# EAGLE board 430 (EAGLE 8.7.0)
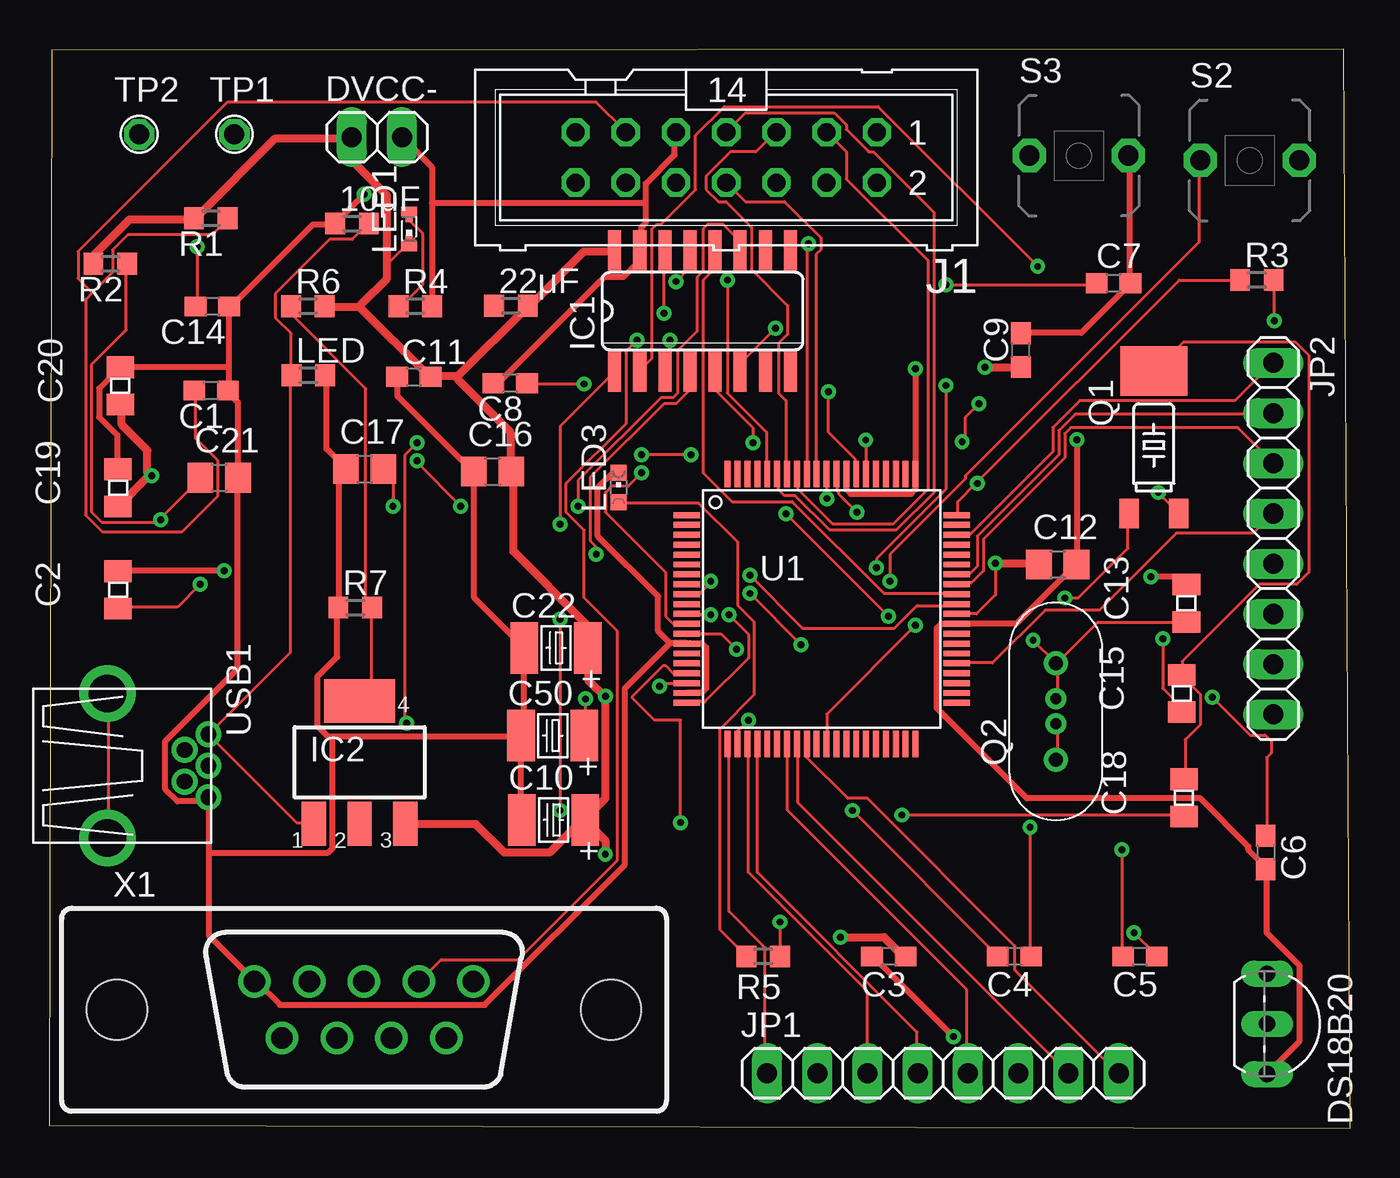
[diagram p0: board, top side]
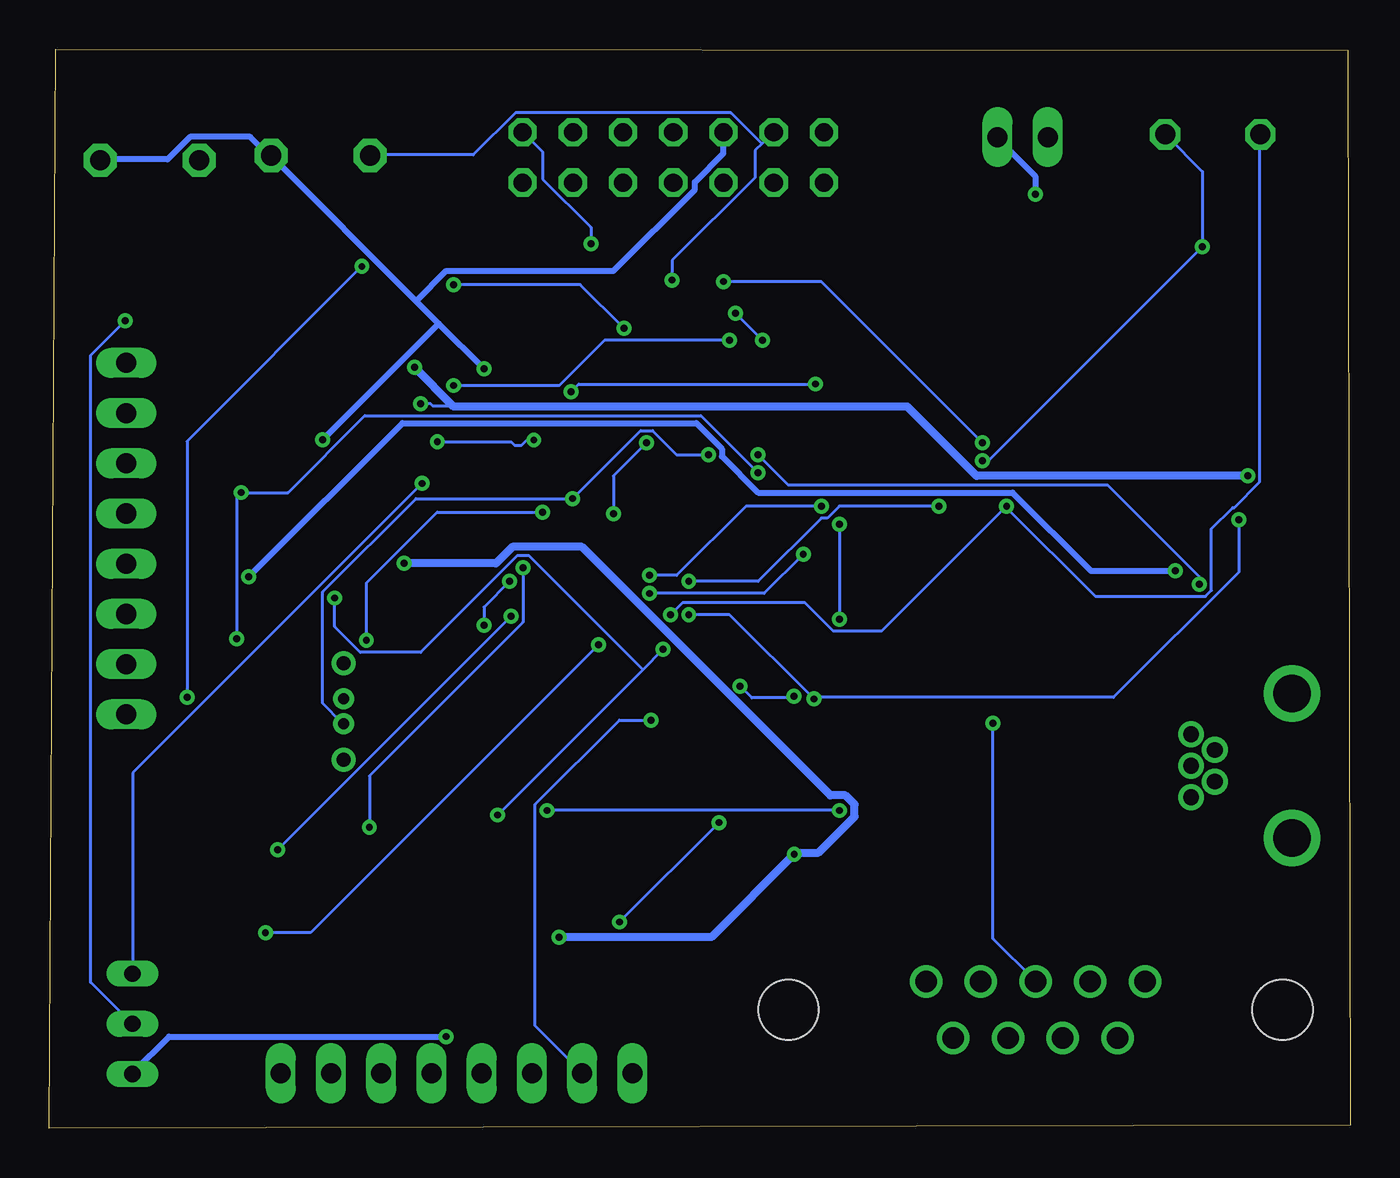
[diagram p1: board, bottom side, seen from below]

Size 65.79 x 54.54 mm. Coordinates in mm from the lower left corner, seen from the top.
Outline: 0,0.13 65.79,0 65.48,54.54 0.12,54.51 0,0.13
Copper layers (1*16): Top 0.035mm / dielectric 1.5mm / Bottom 0.035mm
Design rules "default": minimum track width 6mil, minimum drill 0.35mm, track to track 6mil, track to pad 6mil, pad to pad 6mil, via to via 6mil, smd to smd 6mil, copper to edge 40mil, drill to drill 6mil, minimum pad ring 10mil, minimum via ring 8mil, stop-mask expansion 4mil, vias tented up to drill 0mil, thermal gap 10mil
Net classes: 1 Ground: width 0.305 mm, drill 0.305 mm, clearance 0.152 mm to class 0, clearance 0.152 mm; 2 Power: width 0.406 mm, drill 0.305 mm, clearance 0.152 mm to class 0, clearance 0.152 mm to class 1, clearance 0.152 mm

## Footprints (pad centres in the part's own frame; a part is rotated, then mirrored left to right if it is on the bottom)
R0603 = smd 1 x 1.1: 1 -0.85,0; 2 0.85,0
C0603 = smd 1.1 x 1: 1 -0.85,0; 2 0.85,0
CSMD0805 = smd 1.092 x 1.397: 1 -0.94,0; 2 0.94,0
1210ELKO = smd 1.397 x 2.591: + 1.6,0; - -1.6,0
C0805 = smd 1.3 x 1.5: 1 -0.95,0; 2 0.95,0
TO92- = drill 0.813 long: 1 2.54,0; 2 0,0; 3 -2.54,0
1X02 = drill 1.016 long: 1 -1.27,0; 2 1.27,0
SO16 = smd 0.66 x 2.032: 1 -4.445,-3.073; 2 -3.175,-3.073; 3 -1.905,-3.073; 4 -0.635,-3.073; 5 0.635,-3.073; 6 1.905,-3.073; 7 3.175,-3.073; 8 4.445,-3.073; 9 4.445,3.073; 10 3.175,3.073; 11 1.905,3.073; 12 0.635,3.073; 13 -0.635,3.073; 14 -1.905,3.073; 15 -3.175,3.073; 16 -4.445,3.073
SOT223 = smd 1.219 x 2.235: 1 -2.311,-3.099; 2 0,-3.099; 3 2.311,-3.099 | smd 3.6 x 2.2: 4 0,3.099
ML14 = drill 0.914 octagon: 1 -7.62,-1.27; 2 -7.62,1.27; 3 -5.08,-1.27; 4 -5.08,1.27; 5 -2.54,-1.27; 6 -2.54,1.27; 7 0,-1.27; 8 0,1.27; 9 2.54,-1.27; 10 2.54,1.27; 11 5.08,-1.27; 12 5.08,1.27; 13 7.62,-1.27; 14 7.62,1.27
1X08 = drill 1.016 long: 1 -8.89,0; 2 -6.35,0; 3 -3.81,0; 4 -1.27,0; 5 1.27,0; 6 3.81,0; 7 6.35,0; 8 8.89,0
SMARTLED-TTW = smd 0.8 x 0.5: A 0,-0.875; C 0,0.875 | smd 0.35 x 0.35: A@1 0,-0.5; C@1 0,0.5
CHIPLED_0603 = smd 0.8 x 0.8: A 0,-0.75; C 0,0.75
F20XX_PIR_DEMO_&_EVAL_CMJ206T = smd 1 x 1.5: P1 -1.25,-5; P2 1.25,-5 | smd 3.4 x 2.5: P3 0,2.2
QUARZ_HC49_4P = drill 0.7: 1 2.44,0; 2 -2.44,0 | drill 0.55: 1.1 0.635,0; 2.1 -0.635,0
PBTH = drill 1.016 pad 1.676 octagon: 1 -0.001,0.001; 2 5.001,0.001
TP = drill 1.016 octagon: 1 0,0
PN80 = smd 1.35 x 0.3: 1 -6.825,4.75; 2 -6.825,4.25; 3 -6.825,3.75; 4 -6.825,3.25; 5 -6.825,2.75; 6 -6.825,2.25; 7 -6.825,1.75; 8 -6.825,1.25; 9 -6.825,0.75; 10 -6.825,0.25; 11 -6.825,-0.25; 12 -6.825,-0.75; 13 -6.825,-1.25; 14 -6.825,-1.75; 15 -6.825,-2.25; 16 -6.825,-2.75; 17 -6.825,-3.25; 18 -6.825,-3.75; 19 -6.825,-4.25; 20 -6.825,-4.75; 41 6.825,-4.75; 42 6.825,-4.25; 43 6.825,-3.75; 44 6.825,-3.25; 45 6.825,-2.75; 46 6.825,-2.25; 47 6.825,-1.75; 48 6.825,-1.25; 49 6.825,-0.75; 50 6.825,-0.25; 51 6.825,0.25; 52 6.825,0.75; 53 6.825,1.25; 54 6.825,1.75; 55 6.825,2.25; 56 6.825,2.75; 57 6.825,3.25; 58 6.825,3.75; 59 6.825,4.25; 60 6.825,4.75 | smd 0.3 x 1.35: 21 -4.75,-6.825; 22 -4.25,-6.825; 23 -3.75,-6.825; 24 -3.25,-6.825; 25 -2.75,-6.825; 26 -2.25,-6.825; 27 -1.75,-6.825; 28 -1.25,-6.825; 29 -0.75,-6.825; 30 -0.25,-6.825; 31 0.25,-6.825; 32 0.75,-6.825; 33 1.25,-6.825; 34 1.75,-6.825; 35 2.25,-6.825; 36 2.75,-6.825; 37 3.25,-6.825; 38 3.75,-6.825; 39 4.25,-6.825; 40 4.75,-6.825; 61 4.75,6.825; 62 4.25,6.825; 63 3.75,6.825; 64 3.25,6.825; 65 2.75,6.825; 66 2.25,6.825; 67 1.75,6.825; 68 1.25,6.825; 69 0.75,6.825; 70 0.25,6.825; 71 -0.25,6.825; 72 -0.75,6.825; 73 -1.25,6.825; 74 -1.75,6.825; 75 -2.25,6.825; 76 -2.75,6.825; 77 -3.25,6.825; 78 -3.75,6.825; 79 -4.25,6.825; 80 -4.75,6.825
USB-MB-H = drill 0.8: D+ 5.1,0; D- 3.9,0.8; GND 5.1,-1.6; ID 3.9,-0.8; VBUS 5.1,1.6 | drill 1.9: GND@1 0,3.65; GND@2 0,-3.65
H2R09ST = drill 1.092: 1 5.537,1.422; 2 2.769,1.422; 3 0,1.422; 4 -2.769,1.422; 5 -5.537,1.422; 6 4.153,-1.422; 7 1.384,-1.422; 8 -1.384,-1.422; 9 -4.153,-1.422 | hole 3.048: -12.497,0; 12.497,0

## Placement (x,y rotation side)
10μF  [R0603]  15.3,45.74 0 top
22μF  [R0603]  23.35,41.58 0 top
C1  DNP  [C0603]  8.18,37.29 180 top
C2  47pF  [CSMD0805]  3.47,27.22 90 top
C3  0.1uF  [C0603]  42.46,8.68 180 top
C4  0.1uF  [C0603]  48.81,8.68 180 top
C5  0.1uF  [C0603]  55.16,8.68 180 top
C6  0.1uF  [C0603]  61.52,13.93 270 top
C7  0.1uF  [C0603]  53.83,42.72 0 top
C8  220n  [C0603]  23.31,37.66 180 top
C9  220n  [C0603]  49.14,39.34 90 top
C10  10uF/6,3V  [1210ELKO]  25.5,15.58 0 top
C11  100n  [C0603]  18.43,37.99 0 top
C12  100n  [C0805]  51,28.5 0 top
C13  47pF  [CSMD0805]  57.51,26.54 90 top
C14  DNP  [C0603]  8.25,41.55 180 top
C15  12pF  [CSMD0805]  57.27,21.98 90 top
C16  100n  [C0805]  22.42,33.2 0 top
C17  470n  [C0805]  15.94,33.32 0 top
C18  12pF  [CSMD0805]  57.39,16.7 90 top
C19  10µF  [CSMD0805]  3.47,32.37 90 top
C20  100nF  [CSMD0805]  3.59,37.53 90 top
C21  100n  [C0805]  8.6,32.89 0 top
C22  10uF/6,3V  [1210ELKO]  25.63,24.28 0 top
C50  10uF/6,3V  [1210ELKO]  25.46,19.85 0 top
DS18B20  2N5484  [TO92-]  61.59,5.27 270 top
DVCC-  [1X02]  16.57,50.11 0 top
IC1  MAX3232CSE  [SO16]  33.04,41.31 0 top
IC2  LM340MP-05  [SOT223]  15.69,18.49 0 top
J1  [ML14]  34.23,49.08 180 top
JP1  [1X08]  45.19,2.77 0 top
JP2  [1X08]  61.91,29.81 270 top
LED  [R0603]  13.1,38.07 0 top
LED1  [SMARTLED-TTW]  18.2,45.47 0 top
LED3  [CHIPLED_0603]  28.79,32.4 0 top
Q1  32.768kHz  [F20XX_PIR_DEMO_&_EVAL_CMJ206T]  55.86,36.08 0 top
Q2  QUARZ_HC49_4P-1  [QUARZ_HC49_4P]  50.91,21.07 90 top
R1  47k  [R0603]  8.16,46 180 top
R2  0R  [R0603]  3.08,43.7 180 top
R3  [R0603]  61.07,42.89 0 top
R4  [R0603]  18.51,41.56 0 top
R5  470R  [R0603]  36.11,8.68 180 top
R6  [R0603]  13.08,41.56 0 top
R7  [R0603]  15.47,26.32 0 top
S2  [PBTH]  58.22,48.94 0 top
S3  F5529_RST  [PBTH]  49.58,49.18 0 top
TP1  [TP]  9.36,50.24 0 top
TP2  [TP]  4.53,50.24 0 top
U1  MSP430F5529IPNR  [PN80]  39.06,26.25 0 top
USB1  F5529 Mini-USB  [USB-MB-H]  2.94,18.32 0 top
X1  D-SUB9-H2R09ST  [H2R09ST]  15.91,5.99 0 top

## Library data of the parts
10μF 22μF C3-C7 LED R3 R4 R6 R7 = resistor
C1 C8 C9 C11 C12 C14 C16 C17 C21 R1 R2 = rcl
C2 C13 C15 C18-C20 = CAP
C10 C22 C50 = smd
DS18B20 = transistor-fet
DVCC- JP1 JP2 = pinhead
IC1 = maxim; MPN: MAX3232CSE; OC_FARNELL: 9725490; OC_NEWARK: 90C2890
IC2 = linear
J1 = CON-ML
LED1 LED3 = led
Q1 = MSP-EXP430F5438
Q2 = Project7264
R5 = _MSP430
S2 S3 = electricalmeter
TP1 TP2 = _5438_ATC
U1 = TI_MSP430_v16_intern
USB1 = _con-usb-2
X1 = con-thomas-betts; OC_FARNELL: unknown; OC_NEWARK: unknown

## Nets
5529_LDO [Power]: C9.1 C19.1 C20.1 U1.66
5529_VBUS [Power]: U1.65
A5: U1.2
ACCEL_CS: U1.42
ACCEL_INT: U1.34
ACCEL_PWR: U1.43
ACCEL_SCK: U1.36
ACCEL_SIMO: U1.40
ACCEL_SOMI: U1.41
AVCC: C21.1 C50.+ R2.1 U1.11
CB0: U1.77
CB1: U1.78
CB2: U1.79
CB3: U1.80
CB4: U1.1
CBOUT: JP1.5 U1.27
DVCC [Power]: 22μF.2 C3.1 C10.+ C11.2 C12.1 C16.2 C22.+ DVCC-.1 IC1.16 IC2.3 LED1.A@1 R1.2 R2.2 R6.2 U1.18 U1.50
GND [Ground]: 10μF.1 C1.1 C3.2 C6.2 C7.2 C8.2 C9.2 C10.- C11.1 C12.2 C14.1 C16.1 C17.1 C19.2 C20.2 C21.2 C22.- C50.- DS18B20.1 DVCC-.2 IC1.15 J1.9 LED3.C LED.2 R4.2 R7.1 S2.2 S3.2 U1.14 U1.19 U1.49 U1.61 U1.68 USB1.GND X1.5
JTAG_PWR [Power]: J1.2
JTAG_SENSE: J1.4
LCD_BL_EN: U1.59
LCD_CS: U1.57
LCD_D/C: U1.55
LCD_RST: U1.56
LFXTGND: C15.2 C18.2 Q1.P3
N$1: DS18B20.2 R3.2
N$2: C4.2 IC1.1
N$3: LED1.C@1 R4.1
N$4: C4.1 IC1.3
N$5: C5.2 IC1.5
N$6: C5.1 IC1.4
N$7: C6.1 IC1.2
N$8: C7.1 IC1.6
N$9: IC1.13 X1.3
N$10: IC1.14 X1.2
N$12: IC2.4 R6.1 R7.2
N$14: 10μF.2 IC2.1 LED.1 USB1.VBUS
N$18: JP1.6
N$21: LED3.A R5.2
N$26: JP2.5
N$27: JP2.6
N$28: JP2.7
N$29: JP2.8
N$39: USB1.GND@1 USB1.GND@2
P1.0: JP1.1 U1.21
P1.1: JP1.2 U1.22
P1.2: JP1.3 U1.23
P1.3: JP1.4 U1.24
P1.4: U1.25
P1.5: U1.26
P1.7: JP1.7 U1.28
P2.0: JP1.8 U1.29
P2.1: U1.30
P2.2: S2.1 U1.31
P2.3: U1.32
P2.4: U1.33
P4.0: JP2.4 U1.45
P4.6: JP2.3 U1.53
P4.7: JP2.2 U1.54
P5.1: U1.10
P6.6: U1.3
P6.7: U1.4
P7.0: U1.5
P7.1: U1.6
P7.2: U1.7
P7.3: U1.8
P7.5: JP2.1 U1.58
P7.7: DS18B20.3 R3.1 U1.60
P8.0: U1.15
P8.1: U1.16
P8.2: R5.1 U1.17
PU.0/DP: U1.62
PU.1/DM: U1.64
PUR: U1.63
RF_SIMO: U1.37
RF_SOMI: U1.38
RF_SPI_CLK: U1.39
RF_STE: U1.35
RST/NMI: C1.2 J1.11 R1.1 S3.1 U1.76
RXD: IC1.12 U1.52
SCLK: U1.48
SD_CS: U1.44
SIMO: U1.46
SOMI: U1.47
TCK: J1.7 U1.75
TDI: J1.3 U1.73
TDO: J1.1 U1.72
TEST: J1.8 U1.71
TMS: J1.5 U1.74
TXD: IC1.11 U1.51
V18: C8.1 U1.67
VCORE: C17.2 TP2.1 U1.20
VREF+: C14.2 TP1.1 U1.9
XIN: C15.1 Q1.P2 U1.12
XOUT: C18.1 Q1.P1 U1.13
XT2GND [Ground]: C2.2 C13.2
XT2IN: C13.1 Q2.1 Q2.1.1 U1.69
XT2OUT: C2.1 Q2.2 Q2.2.1 U1.70

## Tracks (layer width: path | path; a pad name or v marks a point on that pad's centre or on a via)
5529_LDO  (via drill 0.35)
  Top 0.152: v47.02,36.63 46.32,35.93 46.32,34.74 46.21,34.74 v46.17,34.7 | v41.29,34.79 41.29,33.09 U1.66
  Top 0.406: v47.32,38.46 49.07,38.46 C9.1 | C19.1 3.5,31.45 5.03,32.98 v5.18,32.98 4.95,33.13 4.95,34.27 3.66,35.57 3.66,36.56 C20.1
  Bottom 0.152: 45.34,36.48 45.36,36.5 46.39,36.5 46.52,36.63 v47.02,36.63 | v46.17,34.7 42.44,34.7 42.27,34.53 41.9,34.53 41.65,34.78 41.31,34.78 v41.29,34.79
  Bottom 0.406: v47.32,38.46 45.34,36.48 22.4,36.48 18.9,32.98 v5.18,32.98
AVCC  (via drill 0.35)
  Top 0.152: v33.45,25.97 32.31,25.97 U1.11 | v27.13,21.7 27.13,19.87 C50.+ | 5.6,30.81 7.62,32.82 C21.1 | 5.6,30.81 5.41,30.61 2.67,30.61 2.13,31.15 2.13,38.62 3.89,40.37 3.89,43.64 R2.1 | v5.64,30.77 5.6,30.81
  Bottom 0.152: v33.45,25.97 31.39,25.97 v27.13,21.7 27.13,21.78 11.96,21.78 5.64,28.1 v5.64,30.77
CBOUT
  Top 0.152: U1.27 37.34,19.41 37.34,16.06 46.41,6.99 46.41,2.8 JP1.5
DVCC  (via drill 0.35)
  Top 0.152: v47.85,28.56 47.85,26.96 46.89,26 U1.50 | 28.12,21.78 v28.12,21.83 | v30.86,22.35 31.01,22.5 U1.18 | LED1.A@1 18.2,44.8 17.07,43.67
  Top 0.406: R2.2 2.29,43.72 2.29,44.18 4.04,45.93 7.24,45.93 R1.2 7.47,46.08 11.43,50.05 15.24,50.05 DVCC-.1 15.32,49.89 15.32,48.9 17.07,47.15 17.07,43.67 17.07,42.96 15.77,41.66 15.7,41.51 | 20.65,38.01 19.36,38.01 C11.2 19.13,38.08 15.7,41.51 | 20.65,38.01 24.16,41.51 22μF.2 24.38,41.66 27.05,44.33 28.57,44.33 IC1.16 | 15.7,41.51 13.95,41.51 R6.2 | 20.65,38.01 20.65,37.85 23.32,35.19 23.32,33.21 C16.2 23.47,33.05 23.47,29.17 27.13,25.51 27.13,24.44 C22.+ 27.28,24.21 27.28,22.61 28.12,21.78 28.12,16.67 27.2,15.76 C10.+ | v40.01,9.66 42.22,9.66 43.13,8.75 43.28,8.75 C3.1 | v28.12,13.85 28.12,14.54 27.13,15.53 C10.+ | v47.85,28.56 49.99,28.56 C12.1 | IC2.3 18.06,15.37 21.57,15.37 23.01,13.93 25.3,13.93 26.9,15.53 C10.+
  Bottom 0.152: v28.12,21.83 28.2,21.75 30.26,21.75 v30.86,22.35
  Bottom 0.406: v40.01,9.66 32.31,9.66 v28.12,13.85 27.96,13.93 26.9,13.93 25.07,15.76 25.07,16.37 25.53,16.82 26.29,16.82 38.86,29.4 42.37,29.4 43.2,28.56 v47.85,28.56
GND  (via drill 0.35)
  Top 0.305: LED.2 14.02,38.01 14.02,34.35 14.94,33.43 C17.1 14.94,33.28 14.63,32.98 14.63,26.35 R7.1 14.55,26.19 14.55,23.83 13.56,22.84 13.56,20.33 14.1,19.79 14.33,19.79 | C11.1 17.6,37.93 17.6,37.02 21.41,33.21 C16.1 21.49,33.05 21.49,26.8 23.93,24.37 C22.- 24,24.21 24,19.87 C50.- | C50.- 23.85,19.79 23.85,15.6 C10.- | 14.33,19.79 23.7,19.79 C50.- | C19.2 3.43,33.36 3.43,35.03 2.52,35.95 2.52,37.4 C20.2 3.73,38.46 9.07,38.46 | 9.07,38.46 9.07,41.51 C14.1 9.22,41.59 13.34,45.7 14.4,45.7 10μF.1 14.55,45.85 v15.93,47.23 | 9.07,38.46 9.07,37.32 C1.1 9.07,37.17 9.53,36.71 9.53,32.9 C21.2 9.53,32.75 9.53,23.22 5.87,19.57 5.87,17.13 6.48,16.52 8,16.52 USB1.GND 8.08,16.67 8.08,13.93 | 31.39,24.52 30.79,25.13 30.79,26.88 27.74,29.93 27.74,32.37 28.5,33.13 28.73,33.13 LED3.C | 31.39,24.52 32.23,24.52 U1.14 32.38,24.52 32.99,24.52 33.22,24.29 33.22,22.23 32.99,22 32.31,22 U1.19 | 8.08,13.93 8.08,9.74 10.36,7.45 X1.5 10.52,7.37 11.66,6.23 22.02,6.23 29.11,13.32 29.11,22.23 31.39,24.52 | 14.33,19.79 14.33,14.16 14.1,13.93 8.08,13.93 | v45.72,4.63 41.68,8.67 C3.2 | DS18B20.1 61.65,2.8 63.25,4.4 63.25,8.21 61.57,9.89 61.57,13.01 C6.2 61.49,13.24 60.66,14.08 60.66,14.23 58.22,16.67 49.45,16.67 44.88,21.24 44.88,25.28 45.11,25.51 45.8,25.51 U1.49 45.95,25.51 48.92,25.51 51.89,28.48 C12.2 51.97,28.63 v51.97,34.81 | 19.36,46.77 19.36,48.6 17.91,50.05 DVCC-.2 | 19.36,46.77 19.36,41.59 R4.2 | C8.2 22.48,37.7 22.71,37.7 28.04,43.04 29.03,43.04 29.79,43.8 29.79,44.33 IC1.15 29.95,44.48 29.95,45.55 30.18,45.78 30.18,46.77 | 30.18,46.77 30.18,47.76 31.62,49.21 31.62,50.35 J1.9
  Top 0.305: 30.18,46.77 19.36,46.77 | C9.2 49.15,40.22 52.2,40.22 54.63,42.65 C7.2 54.63,42.81 54.63,49.13 S3.2 | U1.68 40.31,33.05 40.31,32.29 40.54,32.06 43.59,32.06 43.81,32.29 43.81,33.05 U1.61 43.81,33.21 v43.81,38.39
  Bottom 0.305: v45.72,4.63 59.74,4.63 61.57,2.8 DS18B20.1 | 47.24,41.82 54.56,49.13 S3.2 54.71,49.21 55.63,50.12 58.67,50.12 59.82,48.98 63.17,48.98 S2.2 | 47.24,41.82 46.1,40.67 | 46.1,40.67 v43.81,38.39 | 47.24,41.82 45.72,43.34 37.26,43.34 33.15,47.45 33.15,47.84 31.7,49.28 J1.9 | 46.1,40.67 v51.97,34.81 | v15.93,47.23 15.93,48.14 17.83,50.05 DVCC-.2
LFXTGND
  Top 0.152: C18.2 57.45,17.66 57.45,19.64 58.22,20.4 58.22,21.93 57.3,22.84 C15.2 57.3,22.92 57.3,23.6 61.19,27.49 63.09,27.49 63.7,28.1 63.7,39.07 63.02,39.76 57.38,39.76 55.93,38.31 Q1.P3
N$1  (via drill 0.35)
  Top 0.152: v61.95,40.83 61.95,42.88 R3.2
  Bottom 0.152: v61.95,40.83 63.7,39.07 63.7,7.37 61.65,5.32 DS18B20.2
N$2  (via drill 0.35)
  Top 0.152: v40.62,16.06 47.93,8.75 C4.2 | v25.83,25.74 v25.83,16.06 | v25.83,30.54 25.83,35.49 28.57,38.23 IC1.1
  Bottom 0.152: v25.83,16.06 v40.62,16.06 | v25.83,30.54 v25.83,25.74
N$3
  Top 0.152: LED1.C@1 18.26,45.85 18.89,45.22 18.89,42.68 17.78,41.57 R4.1
N$4  (via drill 0.35)
  Top 0.152: v49.61,15.22 49.61,8.75 C4.1 | v41.83,28.33 41.83,28.79 45.34,32.29 v45.34,37.55 | v31.39,39.83 31.39,38.54 31.17,38.31 IC1.3
  Bottom 0.152: v49.61,15.22 49.61,17.81 41.83,25.59 v41.83,28.33 | v45.34,37.55 40.01,37.55 37.72,39.83 v31.39,39.83
N$5  (via drill 0.35)
  Top 0.152: v54.25,14.08 54.25,8.75 C5.2 | v37.26,31.07 v42.44,25.89 | v35.59,34.65 35.59,35.42 33.68,37.32 IC1.5
  Bottom 0.152: v42.44,25.89 v54.25,14.08 | v37.26,31.07 37.26,32.98 v35.59,34.65
N$6  (via drill 0.35)
  Top 0.152: v54.86,9.89 56.01,8.75 C5.1 | v35.43,27.03 v38.02,24.44 | v27.66,29.01 27.66,29.4 27.36,29.7 27.36,32.9 31.09,36.63 31.7,36.63 32.38,37.32 32.38,38.23 IC1.4
  Bottom 0.152: v54.86,9.89 52.58,9.89 v38.02,24.44 | v35.43,27.03 29.64,27.03 v27.66,29.01
N$7  (via drill 0.35)
  Top 0.152: v58.83,21.78 60.73,19.87 61.49,19.87 61.8,19.57 61.8,18.96 61.57,18.73 61.57,14.84 C6.1 | v49.99,43.57 41.91,51.65 34.14,51.65 32.69,50.2 32.69,47.45 30.94,45.7 30.71,45.7 30.48,45.47 30.48,38.92 29.87,38.31 IC1.2
  Bottom 0.152: v58.83,21.78 58.83,34.73 v49.99,43.57
N$8  (via drill 0.35)
  Top 0.152: v45.34,42.65 52.96,42.65 C7.1 | v36.73,40.44 34.98,38.69 34.98,38.31 IC1.6
  Bottom 0.152: v45.34,42.65 38.94,42.65 v36.73,40.44
N$9  (via drill 0.35)
  Top 0.152: v31.7,42.81 32.38,43.49 32.38,44.33 IC1.13 | v18.59,34.65 17.98,34.04 17.98,20.56 v18.06,20.48
  Bottom 0.152: v31.7,42.81 26.75,42.81 v18.59,34.65 | v18.06,20.48 18.06,9.58 15.93,7.45 X1.3
N$10  (via drill 0.35)
  Top 0.152: v31.09,41.21 31.09,44.33 IC1.14 | v29.72,39.83 29.18,39.3 29.18,35.64 26.14,32.6 26.14,31.15 27.05,30.23 27.05,26.8 28.73,25.13 28.73,13.55 23.7,8.52 19.81,8.52 18.75,7.45 X1.2
  Bottom 0.152: v29.72,39.83 v31.09,41.21
N$12
  Top 0.152: IC2.4 15.7,21.62 16.31,22.23 16.31,26.27 R7.2 16.31,26.35 16,26.65 16,37.4 12.27,41.13 12.27,41.51 R6.1
N$14
  Top 0.152: 10μF.2 16.08,45.7 15.32,44.94 14.17,44.94 11.43,42.2 11.43,40.98 12.19,40.22 12.19,38.08 LED.1 12.19,38.01 12.19,24.06 8.08,19.95 USB1.VBUS 8.08,19.87 12.5,15.45 13.34,15.45 IC2.1
N$21
  Top 0.152: LED3.A 28.8,31.61 32.84,31.61 34.82,29.62 34.82,26.42 35.66,25.59 35.66,21.93 33.91,20.18 33.91,10.04 35.2,8.75 R5.2
N$39
  Top 0.152: USB1.GND@2 2.97,14.69 2.97,21.93 USB1.GND@1
P1.0
  Top 0.152: U1.21 34.37,19.41 34.37,10.95 36.2,9.13 36.2,2.88 36.27,2.8 JP1.1
P1.1  (via drill 0.35)
  Top 0.152: v35.36,20.63 34.82,20.1 34.82,19.49 U1.22
  Bottom 0.152: v35.36,20.63 36.96,20.63 41.22,16.37 41.22,5.16 38.86,2.8 JP1.2
P1.2
  Top 0.152: U1.23 35.36,19.41 35.36,12.94 41.38,6.92 41.38,2.8 JP1.3
P1.3
  Top 0.152: U1.24 35.81,12.94 43.89,4.86 43.89,2.8 JP1.4
P1.7
  Top 0.152: U1.28 37.87,19.41 37.87,16.44 51.51,2.8 JP1.7
P2.0
  Top 0.152: U1.29 38.33,19.41 38.33,18.73 40.39,16.67 41.38,16.67 48.84,9.2 48.84,7.98 54.03,2.8 JP1.8
P2.2  (via drill 0.35)
  Top 0.152: v43.81,25.43 39.32,20.94 39.32,19.49 U1.31 | v42.52,27.64 42.52,29.01 46.33,32.82 46.33,32.98 58.14,44.79 58.14,48.9 S2.1
  Bottom 0.152: v43.81,25.43 43.81,26.35 v42.52,27.64
P4.0
  Top 0.152: U1.45 45.95,23.53 47.7,23.53 50.37,26.19 53.11,26.19 57,30.08 60.88,30.08 61.87,31.07 JP2.4
P4.6
  Top 0.152: U1.53 45.95,27.57 46.63,27.57 47.24,28.18 47.24,29.78 51.36,33.89 51.36,35.11 51.66,35.42 60.12,35.42 61.87,33.66 JP2.3
P4.7
  Top 0.152: U1.54 45.95,28.02 46.56,28.02 46.94,28.4 46.94,29.93 51.05,34.04 51.05,35.26 51.89,36.1 61.87,36.1 JP2.2
P7.5
  Top 0.152: U1.58 45.95,30 46.56,30 50.75,34.2 50.75,35.42 52.12,36.79 59.97,36.79 61.87,38.69 JP2.1
P7.7  (via drill 0.35)
  Top 0.152: 46.9,32.63 45.95,31.68 45.95,31.07 U1.60 | 46.9,32.63 57.15,42.88 60.2,42.88 R3.1 | v46.94,32.6 46.9,32.63
  Bottom 0.152: v46.94,32.6 61.57,17.97 61.57,7.83 DS18B20.3
P8.2  (via drill 0.35)
  Top 0.152: v36.96,10.42 36.96,8.75 R5.1 | v31.93,15.45 31.93,20.63 30.6,20.63 29.49,21.75 29.49,21.83 31.05,23.4 31.15,23.4 31.55,23 U1.17
  Bottom 0.152: v31.93,15.45 v36.96,10.42
RST/NMI  (via drill 0.35)
  Top 0.152: 2.17,42.23 3.2,43.26 3.2,44.41 3.96,45.17 8.23,45.17 8.99,45.93 R1.1 | 2.17,42.23 1.83,41.89 1.83,31 2.67,30.16 6.71,30.16 8.53,31.99 8.53,33.74 7.39,34.88 7.39,37.24 C1.2 | v34.29,42.88 34.29,37.17 36.27,35.19 36.27,33.13 U1.76 | 2.17,42.23 1.45,42.96 1.45,44.33 8.99,51.87 27.66,51.87 29.11,50.43 J1.11
  Bottom 0.152: v34.29,42.88 34.29,43.87 30.1,48.06 30.1,49.44 29.76,49.78 | 29.76,49.78 29.18,50.35 J1.11 | 29.76,49.78 31.32,51.34 42.22,51.34 44.35,49.21 49.53,49.21 S3.1
RXD
  Top 0.152: U1.52 45.87,27.03 42.22,27.03 37.57,31.68 34.52,31.68 33.07,33.13 33.07,42.88 33.6,43.42 33.6,44.33 IC1.12
TCK
  Top 0.152: U1.75 36.88,33.05 36.88,32.29 37.19,31.99 37.72,31.99 39.47,30.23 42.82,30.23 44.73,32.14 44.73,46.31 41.68,49.36 41.45,49.36 40.31,50.5 40.31,50.73 39.7,51.34 35.2,51.34 34.29,50.43 J1.7
TDI
  Top 0.152: U1.73 37.87,33.05 37.87,32.29 39.62,30.54 42.67,30.54 44.42,32.29 44.42,43.87 40.31,47.99 40.31,49.36 J1.3
TDO  (via drill 0.35)
  Top 0.152: v38.41,44.71 38.33,44.64 38.33,33.13 U1.72
  Bottom 0.152: v38.41,44.71 38.41,45.55 40.84,47.99 40.84,49.36 41.83,50.35 J1.1
TEST
  Top 0.152: U1.71 38.79,33.13 38.79,44.18 39.01,44.41 39.01,45.02 37.19,46.85 35.2,46.85 34.29,47.76 J1.8
TMS
  Top 0.152: U1.74 37.26,33.13 37.26,36.79 36.88,37.17 36.88,39.68 37.34,40.14 37.34,41.59 35.51,43.42 35.51,45.55 34.21,46.85 33.83,46.85 33.22,47.45 33.22,48.14 34.44,49.36 35.74,49.36 36.73,50.35 J1.5
TXD  (via drill 0.35)
  Top 0.152: v35.43,27.95 38.1,25.28 42.75,25.28 43.89,26.42 45.87,26.42 U1.51 | v26.75,31.45 26.75,32.75 30.94,36.94 31.55,36.94 31.77,37.17 31.77,39.3 32.77,40.29 32.77,43.04 33.07,43.34 33.07,45.47 33.3,45.7 34.06,45.7 34.9,44.86 34.9,44.41 IC1.11
  Bottom 0.152: v35.43,27.95 34.06,27.95 30.56,31.45 v26.75,31.45
V18  (via drill 0.35)
  Top 0.152: v27.05,37.62 24.23,37.62 C8.1 | v39.4,37.24 39.4,35.19 40.77,33.81 40.77,33.13 U1.67
  Bottom 0.152: v27.05,37.62 39.01,37.62 v39.4,37.24
VCORE  (via drill 0.35)
  Top 0.152: v34.37,25.97 35.36,24.98 35.36,23.76 33.15,21.55 32.31,21.55 U1.20 | v17.37,31.45 17.37,32.82 16.92,33.28 C17.2
  Bottom 0.152: v34.37,25.97 33.76,26.58 27.58,26.58 26.14,25.13 23.7,25.13 v17.37,31.45 17.37,31.38 12.88,26.88 7.32,26.88 7.01,27.19 7.01,30.31 5.94,31.38 5.87,31.38 4.57,32.67 4.57,50.2 TP2.1
VREF+  (via drill 0.35)
  Top 0.152: v7.47,44.56 7.47,41.59 C14.2 | v33.45,27.64 33.45,27.57 32.92,27.03 32.31,27.03 U1.9 | v20.8,31.45 18.59,33.66 v18.59,33.74
  Bottom 0.152: TP1.1 9.3,50.2 7.47,48.37 v7.47,44.56 18.29,33.74 v18.59,33.74 | v33.45,27.64 29.95,27.64 26.75,30.84 26.44,30.84 25.83,31.45 v20.8,31.45
XIN  (via drill 0.35)
  Top 0.152: v29.95,33.13 29.26,32.44 28.42,32.44 28.12,32.14 28.12,31.15 31.17,28.1 31.17,25.89 31.55,25.51 32.23,25.51 U1.12 | v56.08,32.14 57.07,31.15 Q1.P2 | v56.31,24.75 56.31,22.23 57.23,21.32 57.23,21.09 C15.1
  Bottom 0.152: v29.95,33.13 32.84,36.02 49.84,36.02 53.72,32.14 v56.08,32.14 56.31,31.91 v56.31,24.75
XOUT  (via drill 0.35)
  Top 0.152: v34.75,24.21 33.98,24.98 32.31,24.98 U1.13 | v43.13,15.83 57.38,15.83 C18.1 | v51.36,26.8 52.05,26.8 54.56,29.32 54.56,31.07 Q1.P1
  Bottom 0.152: v43.13,15.83 35.78,23.18 | 35.78,23.18 v34.75,24.21 | v51.36,26.8 51.36,25.36 50.06,24.06 47.02,24.06 42.14,28.94 41.53,28.94 35.78,23.18
XT2GND  (via drill 0.35)
  Top 0.305: v8.84,28.18 3.5,28.18 C2.2 | v55.7,27.87 57.07,27.87 57.45,27.49 C13.2
  Bottom 0.305: v8.84,28.18 13.11,28.18 17.07,32.14 29.95,32.14 31.77,33.97 31.77,34.35 33.07,35.64 47.93,35.64 v55.7,27.87
XT2IN  (via drill 0.35)
  Top 0.152: v40.84,31.15 39.93,32.06 39.93,32.14 39.85,32.21 39.85,33.05 U1.69 | v49.76,24.67 50.9,23.53 Q2.1 | C13.1 57.45,25.59 53.03,25.59 50.98,23.53 Q2.1 | Q2.1.1 50.98,21.78 50.98,23.45 Q2.1
  Bottom 0.152: v40.84,31.15 46.18,31.15 49.76,27.57 v49.76,24.67
XT2OUT  (via drill 0.35)
  Top 0.152: v39.32,31.83 39.32,33.05 U1.70 | v7.62,27.49 6.48,26.35 3.5,26.35 C2.1 | v32.46,34.04 v29.95,34.04 | Q2.2 50.98,18.65 50.98,20.4 Q2.2.1
  Bottom 0.152: Q2.2.1 50.98,20.48 51.97,21.47 51.97,27.11 47.24,31.83 v39.32,31.83 35.89,35.26 35.28,35.26 34.06,34.04 v32.46,34.04 | v7.62,27.49 7.62,27.87 12.27,32.52 28.42,32.52 v29.95,34.04